# Altium PCB PCB.PcbDoc
Units mm, origin at the board's own origin, x right, y up, seen from the top; angles counter-clockwise.
Board outline 53 x 24.5 mm, 2 copper layers (Top Layer, Bottom Layer); 13 components, 15 nets, 59 pads, 0 vias.
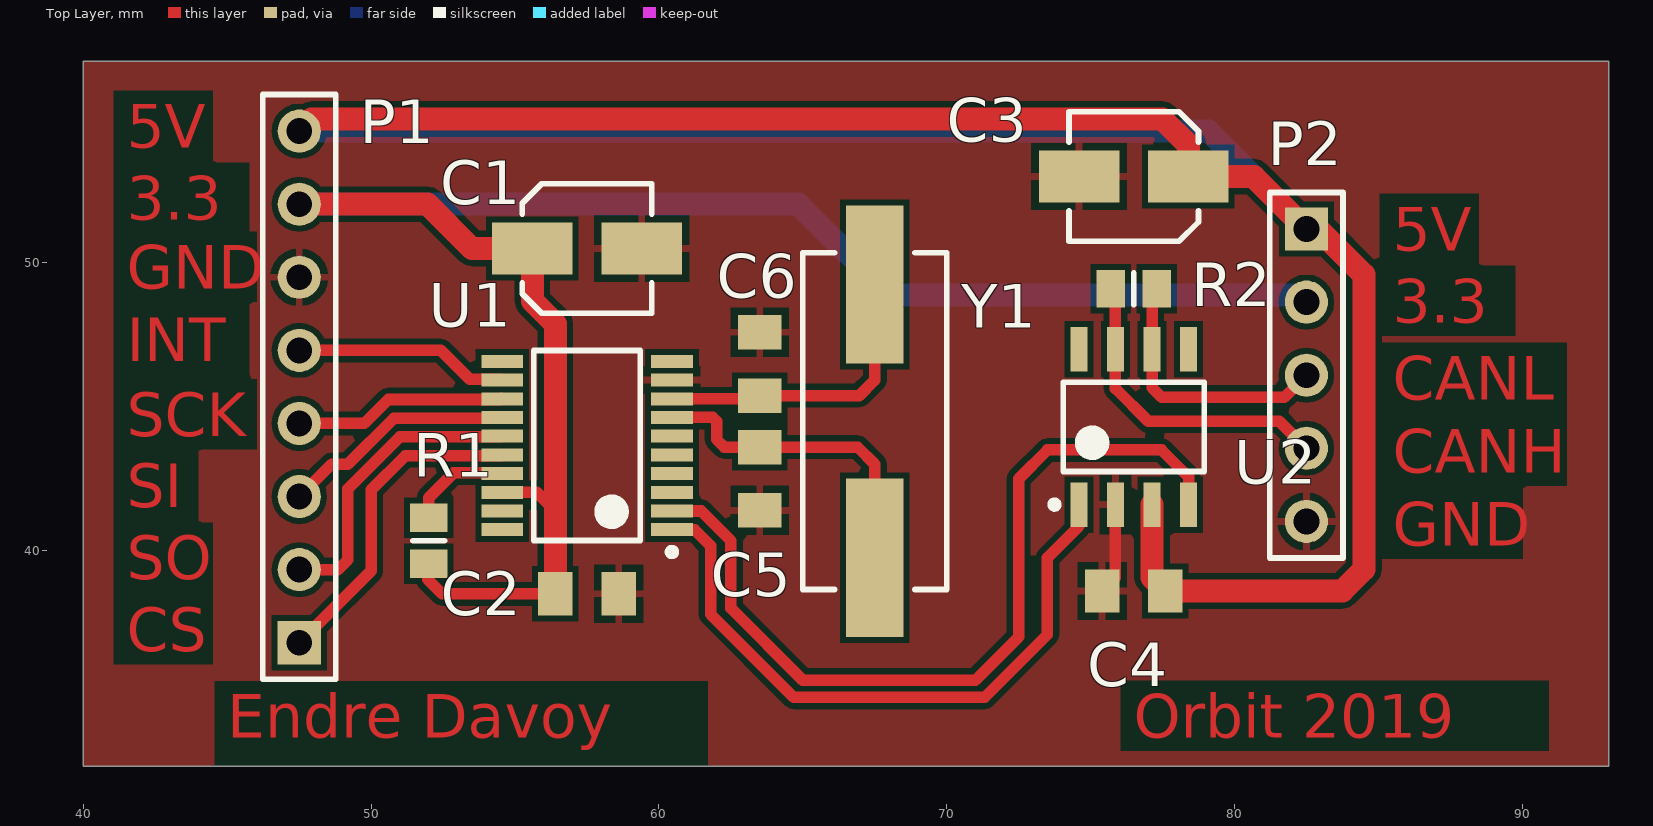
[diagram p0: Top Layer view]
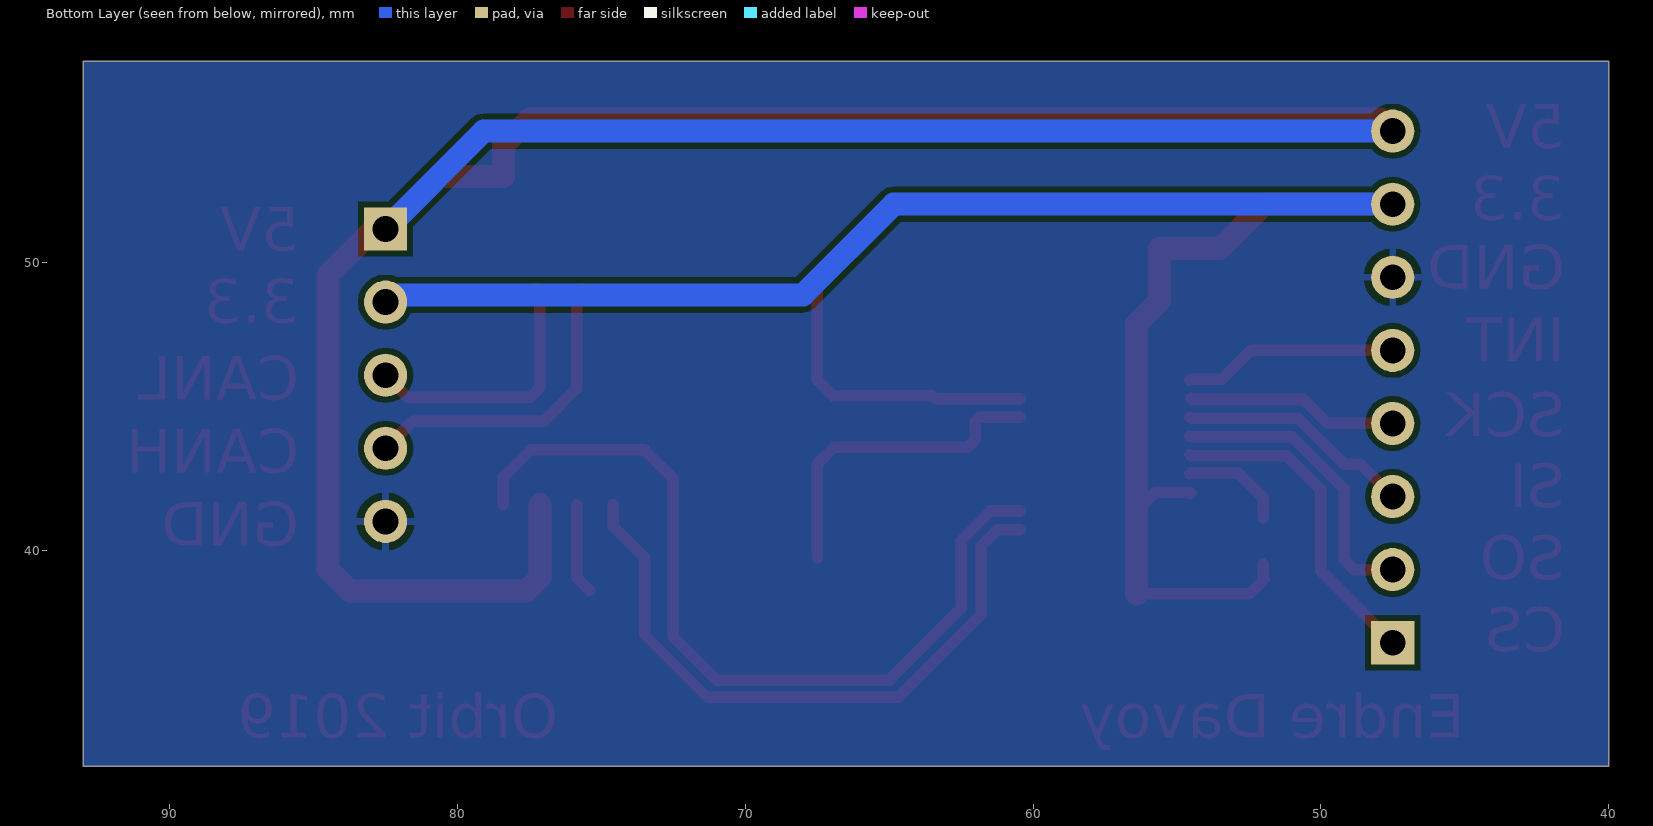
[diagram p1: Bottom Layer view, seen from below]

## Layer stack, top to bottom
Top Solder: solder mask 0.0102, Solder Resist, Dk 3.5
Top Layer: signal copper 0.0356
Dielectric 1: dielectric 0.32, FR-4, Dk 4.8
Bottom Layer: signal copper 0.0356
Bottom Solder: solder mask 0.0102, Solder Resist, Dk 3.5

## Board outline
40,57 40,32.5 93,32.5 93,57

## Design rules (kind name [scope] priority, off if disabled: settings)
Clearance [All] p1: gap=0.2 ignorepadtopadclearanceinfootprint=FALSE
PolygonConnect [All] p1: connectstyle=Relief reliefconductorwidth=0.254 reliefentries=4 polygonreliefangle="90 Angle" airgapwidth=0.254
RoomDefinition "Main Schematic" [InComponentClass('Main Schematic')] p1: confinementstyle=ConfineOut formatcopy=TRUE lockcomponents=FALSE outline 20.574,9.779 41.021,9.779 41.021,22.733 20.574,22.733
RoutingVias [All] p1: holewidth=0.9 width=1.4 viastyle="Through Hole" minholewidth=0.9 minwidth=1.4 maxholewidth=1.1 maxwidth=1.6
SolderMaskExpansion [All] p1: expansion=0.102
Width [All] p1: maxlimit=0.8 minlimit=0.2 preferedwidth=0.4
30 further rules are at their usual default settings.

## Components (designator, comment, footprint, x,y, rotation, side; value= is the part's Value field where it differs from the comment)
C1 "ElCap" CAPAE4343X55M 57.5,50.5 r0 top value=10uF
C2 "Capacitor" CAP0805 57.5,38.5 r0 top value=100nF
C3 "ElCap" CAPAE4343X55M 76.5,53 r180 top value=10uF
C4 "Capacitor" CAP0805 76.5,38.6 r180 top value=100nF
C5 "Capacitor" CAP0805 63.5,42.5 r270 top value=22pF
C6 "Capacitor" CAP0805 63.5,46.488 r90 top value=22pF
P1 "Header 8" HDR1X8 47.5,36.8 r90 top
P2 "Header 5" HDR1X5 82.5,51.177 r270 top
R1 "Resistor" 6-0805_L 52,40.345 r270 top value=10K
R2 "Resistor" 6-0805_L 76.5,49.1 r0 top value=120
U1 "MCP2515" "TSSOP 20-lead 4.4mm" 57.5,43.653 r180 top
U2 "MCP2551" "SOIC 8-LEAD SN" 76.5,44.3 r90 top
Y1 "FOXSDLF/080-20" FOX-HC49SDLF_V 67.5,44.5 r90 top

## Footprints (in the part's own frame and the unit in brackets; to place one, negate y for a bottom-side part, rotate by r counter-clockwise, add the part's x,y. Pads: shape width x height; smd on the part's side, far side on the other; paste and mask are expansions set on the pad)
6-0805_L [mm] "Chip Resistor, Body 2.0x1.2mm, IPC High Density"
  rect 1x1.3 smd: 1(-0.8,0) 2(0.8,0)
  silkscreen extent 0,-0.55 0,0.55, body extent -1.07,-0.7 1.07,0.7, height 0.7
CAP0805 [mm] "Chip Capacitor, 2-Leads, Body 2,00x1,25mm, IPC Low Density"
  rect 1.2x1.5 smd: 1(-1.1,0) 2(1.1,0)
  body extent -1.08,-0.67 1.07,0.67, height 1.45
CAPAE4343X55M [mm] "Aluminum Electrolytic Capacitor, Body 4,00x4,30x5,50mm, IPC Low Density"
  rect 2.8x1.8 smd: 1(-1.9,0) 2(1.9,0)
  silkscreen extent -2.25,-2.25 2.25,2.25, body extent -2.25,-2.25 2.25,2.25, height 5.5
FOX-HC49SDLF_V [mm] "SMD, 2-Leads, Body 5x11.7mm"
  rect 5.5x2 smd: 1(-4.75,0) 2(4.75,0)
  silkscreen extent -5.85,-2.5 5.85,2.5, body extent -6.15,-2.35 6.15,2.35, height 4.34
HDR1X5 [mm] "Connector; Header; 5 Position"
  rect 1.5x1.5 hole 0.9: 1(0,0)
  round 1.5 hole 0.9: 2(2.54,0) 3(5.08,0) 4(7.62,0) 5(10.16,0)
  silkscreen extent -1.27,-1.27 11.43,1.27
HDR1X8 [mm] "Connector; Header; 8 Position"
  rect 1.5x1.5 hole 0.9: 1(0,0)
  round 1.5 hole 0.9: 2(2.54,0) 3(5.08,0) 4(7.62,0) 5(10.16,0) 6(12.7,0) 7(15.24,0) 8(17.78,0)
  silkscreen extent -1.27,-1.27 19.05,1.27
"SOIC 8-LEAD SN" [mm] "SOIC, 8-Leads, Body 4.90x3.90mm, Pitch 1.27mm, IPC Low Density"
  rect 1.55x0.6 smd: 1(-2.7,1.905) 2(-2.7,0.635) 3(-2.7,-0.635) 4(-2.7,-1.905) 5(2.7,-1.905) 6(2.7,-0.635) 7(2.7,0.635) 8(2.7,1.905)
  silkscreen extent -2.82,-2.45 1.55,2.88, body extent -3,-2.45 3,2.45, height 1.75
"TSSOP 20-lead 4.4mm" [mm] "TSOP, 20-Leads, Body 6.50x4.40mm, Pitch 0.65mm, IPC Low Density"
  rect 1.45x0.45 smd: 1(-2.95,2.925) 2(-2.95,2.275) 3(-2.95,1.625) 4(-2.95,0.975) 5(-2.95,0.325) 6(-2.95,-0.325) 7(-2.95,-0.975) 8(-2.95,-1.625) 9(-2.95,-2.275) 10(-2.95,-2.925) 11(2.95,-2.925) 12(2.95,-2.275) 13(2.95,-1.625) 14(2.95,-0.975) 15(2.95,-0.325) 16(2.95,0.325) 17(2.95,0.975) 18(2.95,1.625) 19(2.95,2.275) 20(2.95,2.925)
  silkscreen extent -3.08,-3.3 1.85,3.82, body extent -3.2,-3.3 3.2,3.3, height 1.2

## Part data
C1 C3: Tolerance=20%, Voltage=16V
C2 C4 C5 C6: Package=0603, Tolerance=10%, Voltage=16V
P1: "Header, 8-Pin", LatestRevisionDate=17-Jul-2002, LatestRevisionNote="Re-released for DXP Platform.", Publisher="Altium Limited"
P2: "Header, 5-Pin", LatestRevisionDate=17-Jul-2002, LatestRevisionNote="Re-released for DXP Platform.", Publisher="Altium Limited"
R1 R2: Package=0602, Power Rating=1/4W, Tolerance=1%
Y1: library part CMP-2100-03639-1, "Resistance Weld Crystal, 8 MHz, +/- 30 ppm, -20 to 70 degC, 2-Pin SMD, RoHS, Tape and Reel", Case/Package=SMD/SMT, ESR (Equivalent Series Resistance)=80Ohm, Frequency=8MHz, Frequency Stability=50ppm, Frequency Tolerance=30ppm, Load Capacitance=20pF, Manufacturer="FOX Electronics", Max Operating Temperature=70degC, Min Operating Temperature=-20degC, Package Description="2-Pin Surface Mount Device, Body 5 x 11.7 mm", Package Quantity=1000, Package Reference=HC49SDLF, Datasheet URL=http://www.foxonline.com/pdfs/hc49sdlf.pdf, Datasheet Version=42064.0, Depth=5mm, Height=4.5mm, Lead Free=LeadFree, Length=11.7mm, Manufacturer URL=http://www.foxonline.com/, Mount=SurfaceMount, Number of Pins=2, Packaging=TapeandReel, Radiation Hardening=No, REACH SVHC=NoSVHC, RoHSCompliant=True, Series Resistance=80Ohm, Termination=SMD/SMT, Tolerance=50ppm, Width=5mm
U1: ComponentLink1Description=MOUSER, ComponentLink1URL=https://no.mouser.com/ProductDetail/Microchip-Technology/MCP2515-I-SO?qs=KwArPi4cUogGDbGnphOvtQ==
U2: ComponentLink1Description=MCP2551, ComponentLink1URL=https://no.mouser.com/datasheet/2/268/20001667G-1115479.pdf

## Nets (pads, with @x,y where several pads share a name; then routed paths per layer and width w, separated by ;. In a path a pad name is that pad's centre, name@x,y a point inside that pad or via, vN(x,y) a via of type N, cw(c..) or ccw(c..) an arc to the next point about the centre after c; other vN are vias at no path point)
3.3V: C1.1 C2.1 P1.7 P2.2 R1.2 U1.18 | length 64.8
  Top Layer w0.4: R1.2 52,39.04 51.96,39 52.46,38.5 C2.1 ; U1.18@54.525,42.003 U1.18 55.75,42.028 56.4,41.378
  Top Layer w0.8: P1.7 51.96,52.04 53.5,50.5 C1.1 55.6,48.68 56.4,47.88 56.4,41.378 C2.1
  Bottom Layer w0.8: P1.7 64.845,52.04 68,48.885 82.252,48.885 P2.2
5V: C3.1 C4.1 P1.8 P2.1 U2.3 | length 97.1
  Top Layer w0.8: P1.8 47.92,55 77.5,55 78.4,54.1 C3.1 80.677,53 P2.1 82.918,51.177 84.5,49.595 84.5,39.345 83.755,38.6 C4.1 77.135,39.065 U2.3
  Bottom Layer w0.8: P1.8 79.097,54.58 P2.1
CS: P1.1 U1.16 | length 11.4
  Top Layer w0.4: P1.1 50,39.3 50,42.116 51.187,43.303 54.525,43.303 U1.16
GND: C1.2 C2.2 C3.2 C4.2 C5.2 C6.2 P1.6 P2.5 U1.9 U2.2 | length 3.2
  Top Layer w0.4: C4.2 75.865,39.065 U2.2
INT: P1.5 U1.12 | length 7.5
  Top Layer w0.4: P1.5 52.418,46.96 53.425,45.953 54.525,45.953 U1.12
NetC5_1: C5.1 U1.7 Y1.1 | length 11.3
  Top Layer w0.4: U1.7 61.872,44.628 62,44.5 62,43.865 62.265,43.6 C5.1 66.9,43.6 67.5,43 Y1.1
NetC6_1: C6.1 U1.8 Y1.2 | length 10.6
  Top Layer w0.254: C6.1@63.39,45.278 C6.1
  Top Layer w0.4: U1.8 C6.1@63.39,45.278 ; C6.1 66.96,45.388 67.5,45.928 Y1.2
NetP2_3: P2.3 R2.2 U2.6 | length 9.3
  Top Layer w0.4: R2.2 77.135,48.935 U2.6 77.135,45.665 77.465,45.335 81.738,45.335 P2.3
NetP2_4: P2.4 R2.1 U2.7 | length 11
  Top Layer w0.4: R2.1 75.865,48.935 U2.7 75.865,45.635 77,44.5 81.557,44.5 P2.4
NetR1_1: R1.1 U1.17 | length 3.6
  Top Layer w0.4: R1.1 52,41.84 52.863,42.703 54.525,42.703 U1.17
NetU1_1: U1.1 U2.1 | length 22.7
  Top Layer w0.4: U1.1 61.236,40.728 61.793,40.171 61.793,37.793 64.686,34.9 71.314,34.9 73.5,37.086 73.5,39.75 74.595,40.845 U2.1
NetU1_2: U1.2 U2.4 | length 29.6
  Top Layer w0.4: U1.2 61.467,41.378 62.5,40.345 62.5,38 65,35.5 71,35.5 72.5,37 72.5,42.5 73.5,43.5 77.465,43.5 78.405,42.56 U2.4
SCK: P1.4 U1.13 | length 7.4
  Top Layer w0.4: P1.4 49.759,44.42 50.592,45.253 54.475,45.253 U1.13@54.525,45.303
SI: P1.3 U1.14 | length 8.2
  Top Layer w0.4: P1.3 48.62,43 49.187,43 50.79,44.603 54.525,44.603 U1.14
SO: P1.2 U1.15 | length 10.4
  Top Layer w0.4: P1.2 48.843,39.34 49.191,39.688 49.191,42.156 50.989,43.953 54.525,43.953 U1.15
pads on no net: U1.3 U1.4 U1.5 U1.6 U1.10 U1.11 U1.19 U1.20 U2.5 U2.8

## Polygon pours and split planes (outlines as drawn)
GND on Bottom Layer (solid, pour order 2): 40,57 40,32.5 93,32.5 93,57
GND on Top Layer (solid, pour order 0): 40,57 40,32.5 93,32.5 93,57

## Other copper
Top Layer:
  text "5V" at 41.5,54 h1.52
  text "3.3" at 41.5,51.5 h1.52
  text "5V" at 85.5,50.42 h1.52
  text "GND" at 41.5,49.1 h1.52
  text "3.3" at 85.5,47.92 h1.52
  text "INT" at 41.5,46.578 h1.52
  text "CANL" at 85.5,45.251 h1.52
  text "SCK" at 41.5,43.978 h1.52
  text "CANH" at 85.5,42.711 h1.52
  text "SI" at 41.5,41.5 h1.52
  text "GND" at 85.5,40.171 h1.52
  text "SO" at 41.5,39 h1.52
  text "CS" at 41.5,36.5 h1.52
  text "Endre Davoy" at 45,33.5 h1.52
  text "Orbit 2019" at 76.5,33.5 h1.52